# Altium PCB reciever.PcbDoc
Units mil, origin at the board's own origin, x right, y up, seen from the top; angles counter-clockwise.
Board outline 1500 x 708.66 mil, 2 copper layers (Top Layer, Bottom Layer); 10 components, 18 nets, 84 pads, 30 vias.
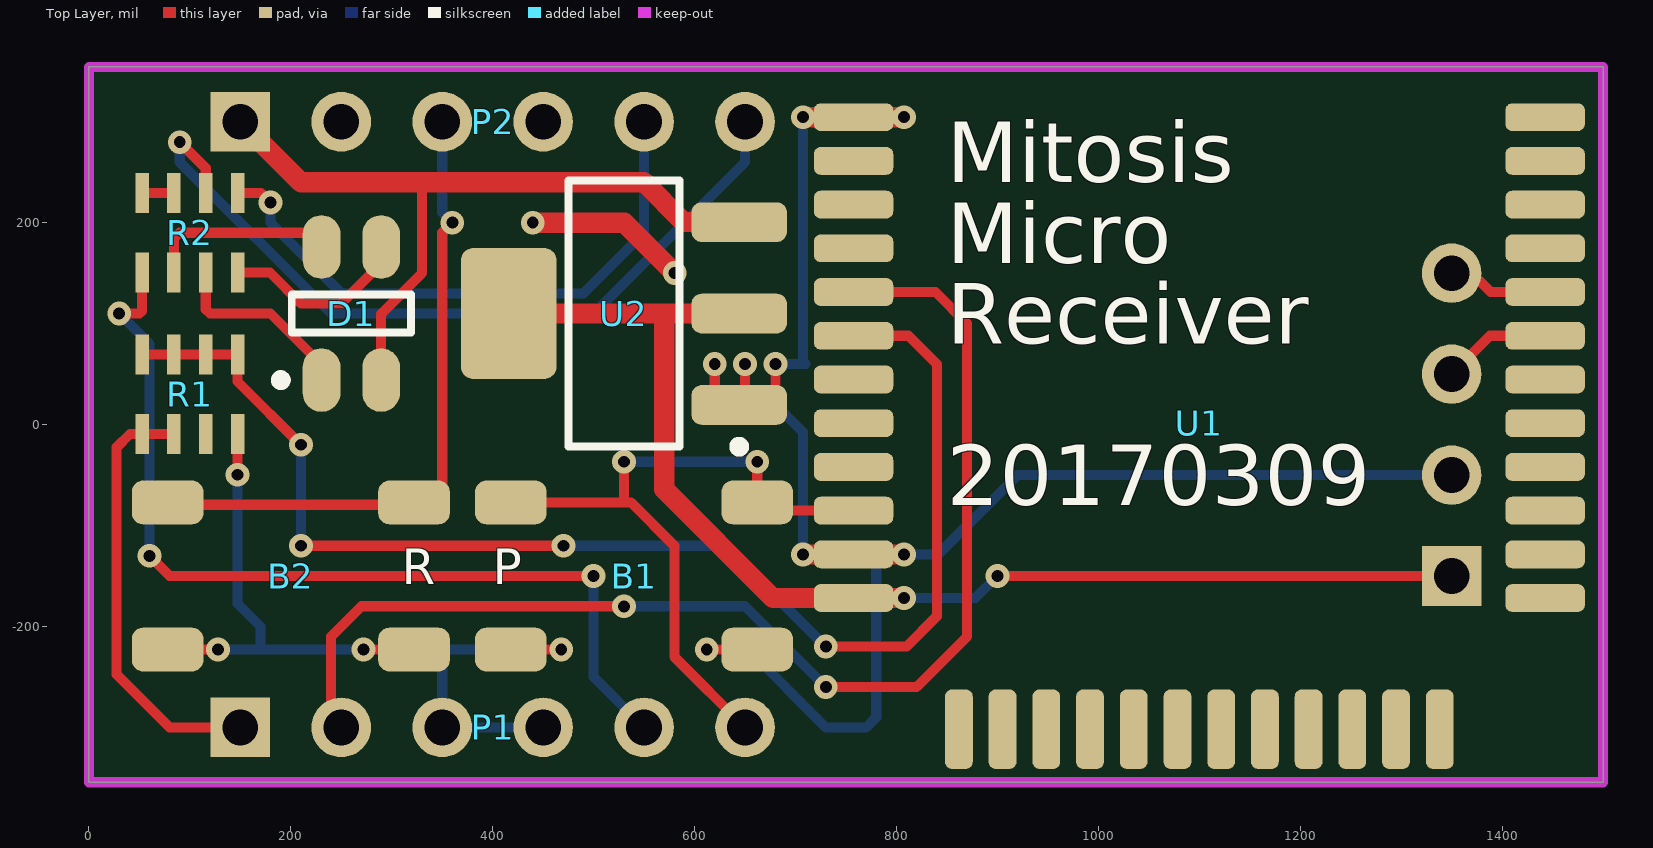
[diagram p0: Top Layer view]
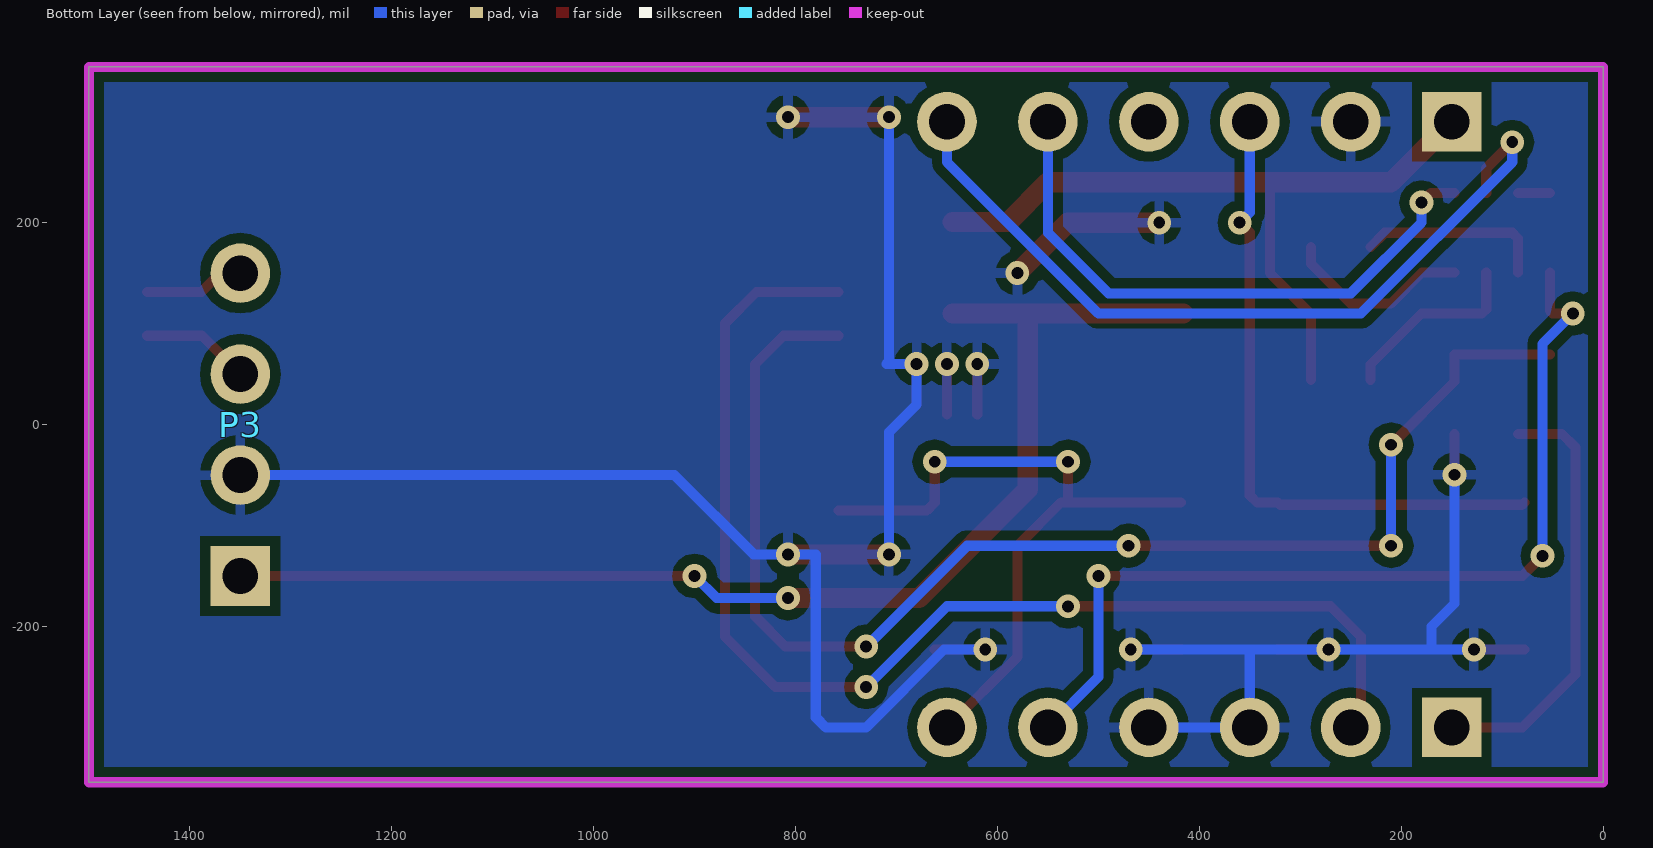
[diagram p1: Bottom Layer view, seen from below]

## Layer stack, top to bottom
Top Layer: signal copper 1.4
Dielectric: dielectric 12.6, FR-4, Dk 4.8
Bottom Layer: signal copper 1.4

## Board outline
0,-354.33 1500,-354.33 1500,354.33 0,354.33

## Design rules (kind name [scope] priority, off if disabled: settings)
Clearance [All] p1: gap=10
PolygonConnect [All] p1: connectstyle=Relief reliefconductorwidth=10 reliefentries=4 polygonreliefangle="90 Angle" airgapwidth=10
RoomDefinition D [InComponentClass('D')] p1: confinementstyle=ConfineOut formatcopy=TRUE lockcomponents=FALSE outline 2125.98,-275.59 2913.39,-275.59 2913.39,748.03 2125.98,748.03
RoutingVias [All] p1: holewidth=11.81 width=23.62 viastyle="Through Hole" minholewidth=11.81 minwidth=23.62 maxholewidth=11.81 maxwidth=23.62
SolderMaskExpansion [All] p1: expansion=4
Width [All] p1: maxlimit=20 minlimit=10 preferedwidth=10
28 further rules are at their usual default settings.

## Components (designator, comment, footprint, x,y, rotation, side; value= is the part's Value field where it differs from the comment)
B1 "Tactile Button" "TACTILE BUTTON" 540,-150 r0 top
B2 "Tactile Button" "TACTILE BUTTON" 200,-150 r0 top
D1 "RGB LED - CREE CA" PLCC4-RGBLED 260,110 r90 top
P1 "Header 6" HDR1X6 150,-300 r0 top
P2 "Header 6" HDR1X6 150,300 r0 top
P3 "Header 4" HDR1X4 1350,-150 r90 bottom
R1 "RAVF" "1206 quad res" 100,30 r180 top
R2 "RAVF" "1206 quad res" 100,190 r180 top
U1 "Core51822 (B)" "Core51822 (B)" 1100,525 r0 top
U2 "NCP1117" SOT230P700X180-4N 530,110 r180 top

## Footprints (in the part's own frame and the unit in brackets; to place one, negate y for a bottom-side part, rotate by r counter-clockwise, add the part's x,y. Pads: shape width x height; smd on the part's side, far side on the other; paste and mask are expansions set on the pad)
"1206 quad res" [mm]
  rect 0.34x1 smd: 1(-1.2,-1) 2(-1.2,1) 3(-0.4,-1) 4(-0.4,1) 5(0.4,-1) 6(0.4,1) 7(1.2,-1) 8(1.2,1)
  body extent -1.6,-0.8 1.6,0.8, height 1.1
"Core51822 (B)" [mm]
  rrect50% 2x0.7 smd: 1(-8.7,-5.6) 2(-8.7,-6.7) 3(-8.7,-7.8) 4(-8.7,-8.9) 5(-8.7,-10) 6(-8.7,-11.1) 7(-8.7,-12.2) 8(-8.7,-13.3) 9(-8.7,-14.4) 10(-8.7,-15.5) 11(-8.7,-16.6) 12(-8.7,-17.7) 25(8.7,-17.7) 26(8.7,-16.6) 27(8.7,-15.5) 28(8.7,-14.4) 29(8.7,-13.3) 30(8.7,-12.2) 31(8.7,-11.1) 32(8.7,-10) 33(8.7,-8.9) 34(8.7,-7.8) 35(8.7,-6.7) 36(8.7,-5.6)
  rrect50% 0.7x2 smd: 13(-6.05,-21) 14(-4.95,-21) 15(-3.85,-21) 16(-2.75,-21) 17(-1.65,-21) 18(-0.55,-21) 19(0.55,-21) 20(1.65,-21) 21(2.75,-21) 22(3.85,-21) 23(4.95,-21) 24(6.05,-21)
  body extent -8.5,-20.8 8.5,0, height 1.8
HDR1X4 [mm] "Connector; Header; 4 Position"
  rect 1.5x1.5 hole 0.9: 1(0,0)
  round 1.5 hole 0.9: 2(2.54,0) 3(5.08,0) 4(7.62,0)
HDR1X6 [mm] "Connector; Header; 6 Position"
  rect 1.5x1.5 hole 0.9: 1(0,0)
  round 1.5 hole 0.9: 2(2.54,0) 3(5.08,0) 4(7.62,0) 5(10.16,0) 6(12.7,0)
PLCC4-RGBLED [mm]
  oval 1.6x0.95 smd: 1(-1.675,0.75) 2(-1.675,-0.75) 3(1.675,-0.75) 4(1.675,0.75)
  silkscreen extent -1.8,-1.5 0.48,1.9, body extent -1.7,-1.5 1.7,1.5, height 2.2
SOT230P700X180-4N [mm] "SOT223, 4-Leads, Body 6.50x7.00mm (avg), Pitch 2.30mm, IPC Medium Density"
  rrect50% 2.4x1 smd: 1(-2.9,2.3) 2(-2.9,0) 3(-2.9,-2.3)
  rrect25% 2.4x3.3 smd: 4(2.9,0)
  silkscreen extent -3.03,-3.35 1.4,3.47, body extent -1.85,-3.35 1.85,3.35, height 1.8
"TACTILE BUTTON" [mm]
  rrect50% 1.8x1.1 smd: 1(-3.1,1.85) 1(3.1,1.85) 2(-3.1,-1.85) 2(3.1,-1.85)
  body extent -2.6,-2.6 2.6,2.6, height 1.6

## Part data
D1: "Tri Colour CA RGB LEDs - CLV1A-FKB"
P1 P2: "Header, 6-Pin"
P3: "Header, 4-Pin"
R1 R2: library part RAVF_Multi, "RAVF164DJT100R"
U1: "NRF51822 (B)"

## Via types
v1: diameter 23.62, hole 11.81, Top Layer to Bottom Layer, tented both sides, 30 vias

## Nets (pads, with @x,y where several pads share a name; then routed paths per layer and width w, separated by ;. In a path a pad name is that pad's centre, name@x,y a point inside that pad or via, vN(x,y) a via of type N, cw(c..) or ccw(c..) an arc to the next point about the centre after c; other vN are vias at no path point)
5V0: P2.4
B: D1.3 R2.2 | length 187.8
  Top Layer w10: R2.2 179.37,150.63 210,120 250,120 289.53,159.53 D1.3
B-A3: P2.5 R2.1 | length 590.5
  Top Layer w10: R2.1 170.63,229.37 v1(180,220)
  Bottom Layer w10: v1(180,220) 180,200 250,130 490,130 550,190 P2.5
G: D1.4 R2.6 | length 188
  Top Layer w10: R2.6 84.25,184.25 90,190 216.42,190 D1.4
G-D2: P1.5 R2.8 | length 933.2
  Top Layer w10: v1(30,110) 50,110 52.76,112.76 R2.8 ; v1(60,-130) 80,-150 v1(500,-150)
  Bottom Layer w10: v1(30,110) 60,80 v1(60,-130) ; v1(500,-150) 500,-250 P1.5
GND: B1.2 B2.2 P1.3 P1.4 P2.2 P3.2 R1.2 U1.1 U1.11 U2.1 | length 2885.5
  Top Layer w10: B2.2@77.95,-222.83 v1(127.95,-222.83) ; v1(147.24,-49.68) R1.2 ; v1(272.05,-222.83) B2.2@322.05,-222.83 ; B1.2@417.95,-222.83 v1(467.95,-222.83) ; v1(612.05,-222.83) B1.2@662.05,-222.83 ; U2.1@620,10 v1(620,60) ; U2.1@650,10 v1(650,60) ; U2.1@680,19.45 v1(680,60)
  Top Layer w20: v1(439.69,200) 530.31,200 v1(580.31,150) ; v1(707.48,-128.54) U1.11 v1(807.48,-128.54) ; v1(707.48,304.53) U1.1 v1(807.48,304.53)
  Bottom Layer w10: v1(127.95,-222.83) 170,-222.83 ; v1(147.24,-49.68) 147.24,-177.24 170,-200 170,-222.83 ; P1.4 P1.3 350,-222.83 ; v1(467.95,-222.83) 350,-222.83 ; v1(612.05,-222.83) 652.83,-222.83 730,-300 770,-300 780,-290 780,-128.54 v1(807.48,-128.54) 841.46,-128.54 920,-50 P3.2 ; v1(707.48,-128.54) 707.48,-7.48 680,20 v1(680,60) 710,60 707.48,62.52 v1(707.48,304.53) ; 170,-222.83 v1(272.05,-222.83) 350,-222.83
NetR2_5: R2.5 R2.7 | length 31.5
  Top Layer w10: R2.7 R2.5
P-D3: B1.1 P1.6 U1.10 | length 700.2
  Top Layer w10: B1.1@417.95,-77.17 530,-77.17 ; v1(530,-36.85) 530,-77.17 ; P1.6 580,-230 580,-120 537.17,-77.17 530,-77.17 ; v1(662.05,-36.85) 662.05,-77.17 670.12,-85.24 U1.10
  Bottom Layer w10: v1(530,-36.85) v1(662.05,-36.85)
R: D1.1 R2.4 | length 189.2
  Top Layer w10: R2.4 115.75,114.25 120,110 180,110 230.47,59.53 D1.1
R-A2: P2.6 R2.3 | length 805
  Top Layer w10: v1(90,279.73) 115.75,253.98 R2.3
  Bottom Layer w10: v1(90,279.73) 90,260 240,110 500,110 650,260 P2.6
RST: B2.1 P2.3 | length 655.1
  Top Layer w10: B2.1@77.95,-77.17 80.16,-79.37 319.84,-79.37 322.05,-77.17 342.83,-77.17 350,-70 350,190 v1(360,200)
  Bottom Layer w10: P2.3 350,210 v1(360,200)
RXI: P1.2 U1.5 | length 1225.9
  Top Layer w10: P1.2 240,-290 240,-210 270,-180 v1(530,-180) ; v1(730,-260) 820,-260 870,-210 870,100 838.7,131.3 U1.5
  Bottom Layer w10: v1(530,-180) 650,-180 v1(730,-260)
SWCLK: P3.4 U1.32 | length 100.3
  Top Layer w10: P3.4 1370,150 1388.7,131.3 U1.32
SWDIO: P3.3 U1.31 | length 108.3
  Top Layer w10: P3.3 1387.99,87.99 U1.31
TXO: P1.1 R1.6 R1.8 | length 431.4
  Top Layer w10: R1.6 R1.8 40.63,-9.37 27.52,-22.48 27.52,-247.52 80,-300 P1.1
TXO_DIV: R1.1 R1.3 R1.5 R1.7 U1.6 | length 1337.8
  Top Layer w10: R1.7 R1.5 R1.3 R1.1 147.24,42.76 v1(210,-20) ; v1(210,-120) v1(470,-120) ; v1(730,-220) 810,-220 840,-190 840,60 812.01,87.99 U1.6
  Bottom Layer w10: v1(210,-120) v1(210,-20) ; v1(470,-120) 630,-120 v1(730,-220)
VCC: P3.1 U1.12 U2.2 U2.4 | length 1236.2
  Top Layer w10: v1(900,-150) P3.1
  Top Layer w20: U2.4 U2.2 ; 570,110 570,-64.15 677.7,-171.85 U1.12 v1(807.48,-171.85)
  Bottom Layer w10: v1(807.48,-171.85) 878.15,-171.85 v1(900,-150)
VIN: D1.2 P2.1 U2.3 | length 748.1
  Top Layer w10: D1.2 289.53,109.53 330,150 330,240
  Top Layer w20: P2.1 210,240 330,240 550,240 589.45,200.55 U2.3
pads on no net: R1.4 U1.2 U1.3 U1.4 U1.7 U1.8 U1.9 U1.13 U1.14 U1.15 U1.16 U1.17 U1.18 U1.19 U1.20 U1.21 U1.22 U1.23 U1.24 U1.25 U1.26 U1.27 U1.28 U1.29 U1.30 U1.33 U1.34 U1.35 U1.36

## Polygon pours and split planes (outlines as drawn)
GND on Bottom Layer "Bottom Layer-No Net" (solid, remove dead copper, pour order 2): 10,340 1490,340 1490,-340 10,-340 10,340

## Keep-outs
Keep-Out Layer:
  the board outline again, w10

## Silkscreen, mask and mechanical layers (free items; w line width, h text height)
Top Overlay:
  text "Mitosis" at 850,240 h60
  text "Micro" at 850,160 h60
  text "Receiver" at 850,80 h60
  text "20170309" at 850,-80 h60
  text "R" at 310,-170 h60
  text "P" at 400,-170 h60